# Altium PCB ENOCHv1.0.PcbDoc
Units mil, origin at the board's own origin, x right, y up, seen from the top; angles counter-clockwise.
Board outline 472.44 x 503.94 mil, 2 copper layers (Top Layer, Bottom Layer); 22 components, 15 nets, 55 pads, 20 vias.
Unrouted connection lines stored in the file: 45.
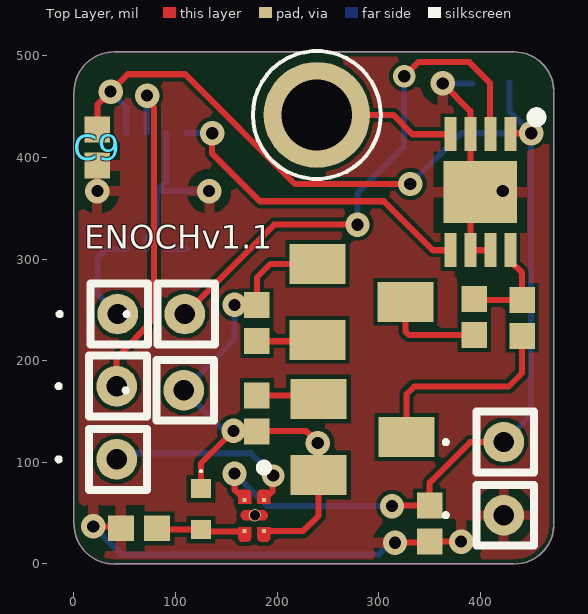
[diagram p0: Top Layer view]
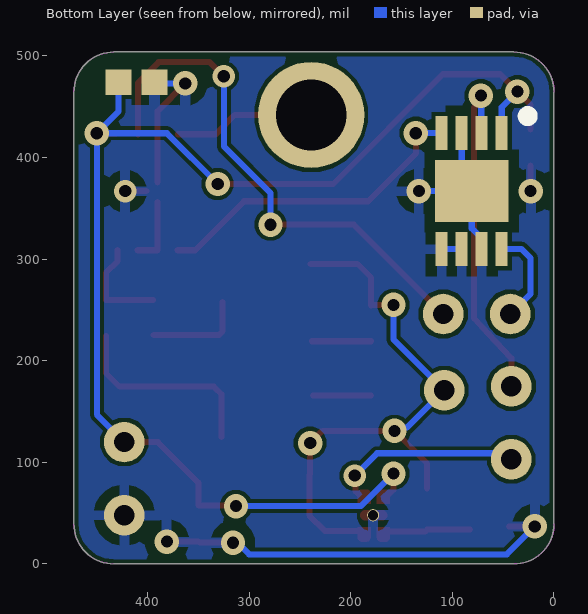
[diagram p1: Bottom Layer view, seen from below]
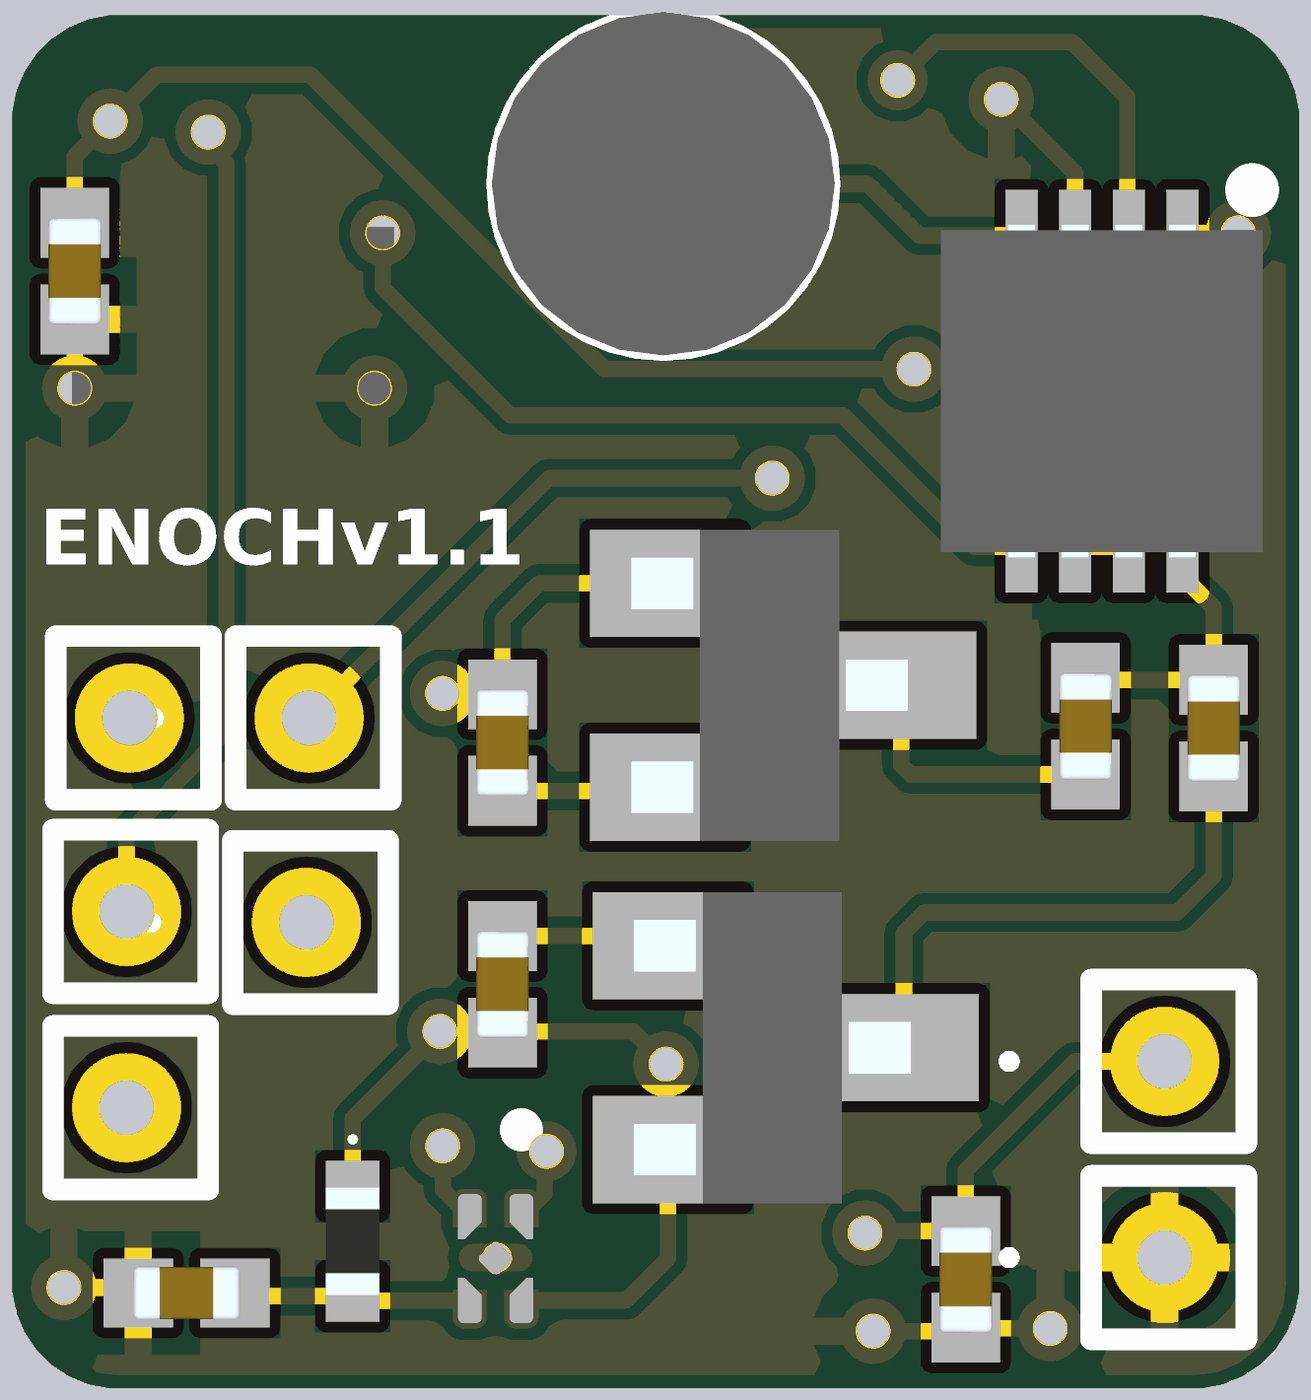
[diagram p2: 3D render of the assembled board from above, using the file's embedded part models]

## Layer stack, top to bottom
Top Solder: solder mask 0.4, Solder Resist, Dk 3.5
Top Layer: signal copper 1.4
Dielectric 1: dielectric 12.6, FR-4, Dk 4.8
Bottom Layer: signal copper 1.4
Bottom Solder: solder mask 0.4, Solder Resist, Dk 3.5

## Board outline
39.37,0 cw(c39.37,39.37) 0,39.37 0,464.57 cw(c39.37,464.57) 39.37,503.94 433.07,503.94 cw(c433.07,464.57) 472.44,464.57 472.44,39.37 cw(c433.07,39.37) 433.07,0

## Design rules (kind name [scope] priority, off if disabled: settings)
Clearance [All] p1: gap=4 ignorepadtopadclearanceinfootprint=FALSE
HoleToHoleClearance [All] p1: gap=4 allowstackedmicrovias=TRUE
PolygonConnect [All] p1: connectstyle=Relief reliefconductorwidth=10 reliefentries=4 polygonreliefangle="90 Angle" airgapwidth=10
RoutingVias [All] p1: holewidth=12 width=24 viastyle="Through Hole" minholewidth=12 minwidth=24 maxholewidth=12 maxwidth=24
SilkToSolderMaskClearance [IsPad] p1: minsilkscreentomaskgap=2 clearancetoexposedcopper=TRUE
SolderMaskExpansion [All] p1: expansion=4 istentingtop=FALSE
SupplyNets "Schematic Supply Nets" [InNet('GND')] p1: voltage=0.000
Width [All] p1: maxlimit=10 minlimit=6 preferedwidth=6
28 further rules are at their usual default settings.

## Components (designator, comment, footprint, x,y, rotation, side; value= is the part's Value field where it differs from the comment)
C1 "4.7pF" CAPC1005X56N 394,243 r270 top
C2 "4.7pF" CAPC1005X56N 180,237 r90 top
C3 "100nF" CAPC1005X56N 64,35 r0 top
C4 "4.7pF" CAPC1005X56N 441,242.28 r270 top
C5 "4.7pF" CAPC1005X56N 180,148.28 r270 top
C6 "100pf" CAPC1005X56N 411,474 r0 bottom
C7 "0.1uf" CAPC1005X56N 350,40 r90 top
C9 "100pf" CAPC1005X56N 23,410 r90 top
CR1 "SMS7621-005LF" SOT23 283,258 r270 top
CR2 "SMS7621-005LF" SOT23 284,125 r270 top
IC1 "ADG918BCPZ-REEL7" SON50P300X300X85-9N-D 400,365.91 r270 top
IC2 "ADG901SCPZ-EP-RL7" SON50P300X300X85-9N-D 81,367 r270 bottom
J1 "1508-2" 15082 239,442 r0 top
J2 "850-10-001-10-001000" 8501000110001000 423,120 r0 top
J3 "850-10-001-10-001000" 8501000110001000 423,48 r0 top
J4 "850-10-001-10-001000" 8501000110001000 108,171 r0 top
J5 "850-10-001-10-001000" 8501000110001000 42,103 r0 top
J6 "850-10-001-10-001000" 8501000110001000 42,175 r0 top
J7 "850-10-001-10-001000" 8501000110001000 109,246 r0 top
J9 "850-10-001-10-001000" 8501000110001000 43,246 r0 top
R1 "100K" ERJ2RKD1004X 125,54 r270 top
U1 "TLV7031DPWR" IC_TLV7031DPWR 177.45,47.65 r270 top

## Footprints (in the part's own frame and the unit in brackets; to place one, negate y for a bottom-side part, rotate by r counter-clockwise, add the part's x,y. Pads: shape width x height; smd on the part's side, far side on the other; paste and mask are expansions set on the pad)
15082 [mm]
  round 2.655 hole 1.77: 1(0,0)
  silkscreen extent -1.6,-1.6 1.6,1.6, body extent -1.6,-1.59 1.6,1.59, height 2.46
8501000110001000 [mil]
  round 40 hole 20: 1(0,0)
  silkscreen extent -59,-30 30,30
CAPC1005X56N [mm]
  rect 0.65x0.64 smd: 1(-0.45,0) 2(0.45,0)
  body extent -0.5,-0.25 0.5,0.25, height 0.56
ERJ2RKD1004X [mm]
  rect 0.475x0.5 smd: 1(-0.512,0) 2(0.512,0)
  silkscreen extent -0.97,-0.03 -0.93,0.03, body extent -0.5,-0.25 0.5,0.25, height 0.35
IC_TLV7031DPWR [mm]
  rect 0.1x0.1 smd paste-1 mask+0: 1(-0.39,0.24) 2(-0.39,-0.24) 4(0.39,-0.24) 5(0.39,0.24)
  round 0.305 hole 0.254 mask+0: 3(-0.009,0.014)
  Top Layer region: 0.56,0.399 0.566,0.399 0.571,0.398 0.576,0.397 0.581,0.395 0.586,0.393 0.591,0.391 0.595,0.389 0.6,0.387 0.604,0.384 0.609,0.381 0.613,0.378 0.617,0.374 0.621,0.371 0.624,0.367 0.628,0.363 0.631,0.359 0.634,0.354 0.637,0.35 0.639,0.345 0.641,0.341 0.643,0.336 0.645,0.331 0.647,0.326 0.648,0.321 0.649,0.316 0.649,0.31 0.65,0.305 0.65,0.3 0.65,0.18 0.65,0.175 0.649,0.17 0.649,0.164 0.648,0.159 0.647,0.154 0.645,0.149 0.643,0.144 0.641,0.139 0.639,0.135 0.637,0.13 0.634,0.126 0.631,0.121 0.628,0.117 0.624,0.113 0.621,0.109 0.617,0.106 0.613,0.102 0.609,0.099 0.604,0.096 0.6,0.093 0.595,0.091 0.591,0.089 0.586,0.087 0.581,0.085 0.576,0.083 0.571,0.082 0.566,0.081 0.56,0.081 0.555,0.08 0.29,0.08 0.29,0.4 0.555,0.4
  Top Layer region: -0.29,-0.08 -0.29,-0.4 -0.555,-0.4 -0.56,-0.399 -0.566,-0.399 -0.571,-0.398 -0.576,-0.397 -0.581,-0.395 -0.586,-0.393 -0.591,-0.391 -0.595,-0.389 -0.6,-0.387 -0.604,-0.384 -0.609,-0.381 -0.613,-0.378 -0.617,-0.374 -0.621,-0.371 -0.624,-0.367 -0.628,-0.363 -0.631,-0.359 -0.634,-0.354 -0.637,-0.35 -0.639,-0.345 -0.641,-0.341 -0.643,-0.336 -0.645,-0.331 -0.647,-0.326 -0.648,-0.321 -0.649,-0.316 -0.649,-0.31 -0.65,-0.305 -0.65,-0.3 -0.65,-0.18 -0.65,-0.175 -0.649,-0.17 -0.649,-0.164 -0.648,-0.159 -0.647,-0.154 -0.645,-0.149 -0.643,-0.144 -0.641,-0.139 -0.639,-0.135 -0.637,-0.13 -0.634,-0.126 -0.631,-0.121 -0.628,-0.117 -0.624,-0.113 -0.621,-0.109 -0.617,-0.106 -0.613,-0.102 -0.609,-0.099 -0.604,-0.096 -0.6,-0.093 -0.595,-0.091 -0.591,-0.089 -0.586,-0.087 -0.581,-0.085 -0.576,-0.083 -0.571,-0.082 -0.566,-0.081 -0.56,-0.081 -0.555,-0.08
  Top Layer region: -0.29,0.08 -0.555,0.08 -0.56,0.081 -0.566,0.081 -0.571,0.082 -0.576,0.083 -0.581,0.085 -0.586,0.087 -0.591,0.089 -0.595,0.091 -0.6,0.093 -0.604,0.096 -0.609,0.099 -0.613,0.102 -0.617,0.106 -0.621,0.109 -0.624,0.113 -0.628,0.117 -0.631,0.121 -0.634,0.126 -0.637,0.13 -0.639,0.135 -0.641,0.139 -0.643,0.144 -0.645,0.149 -0.647,0.154 -0.648,0.159 -0.649,0.164 -0.649,0.17 -0.65,0.175 -0.65,0.18 -0.65,0.3 -0.65,0.305 -0.649,0.31 -0.649,0.316 -0.648,0.321 -0.647,0.326 -0.645,0.331 -0.643,0.336 -0.641,0.341 -0.639,0.345 -0.637,0.35 -0.634,0.354 -0.631,0.359 -0.628,0.363 -0.624,0.367 -0.621,0.371 -0.617,0.374 -0.613,0.378 -0.609,0.381 -0.604,0.384 -0.6,0.387 -0.595,0.389 -0.591,0.391 -0.586,0.393 -0.581,0.395 -0.576,0.397 -0.571,0.398 -0.566,0.399 -0.56,0.399 -0.555,0.4 -0.29,0.4
  Top Layer region: 0.56,-0.081 0.566,-0.081 0.571,-0.082 0.576,-0.083 0.581,-0.085 0.586,-0.087 0.591,-0.089 0.595,-0.091 0.6,-0.093 0.604,-0.096 0.609,-0.099 0.613,-0.102 0.617,-0.106 0.621,-0.109 0.624,-0.113 0.628,-0.117 0.631,-0.121 0.634,-0.126 0.637,-0.13 0.639,-0.135 0.641,-0.139 0.643,-0.144 0.645,-0.149 0.647,-0.154 0.648,-0.159 0.649,-0.164 0.649,-0.17 0.65,-0.175 0.65,-0.18 0.65,-0.3 0.65,-0.305 0.649,-0.31 0.649,-0.316 0.648,-0.321 0.647,-0.326 0.645,-0.331 0.643,-0.336 0.641,-0.341 0.639,-0.345 0.637,-0.35 0.634,-0.354 0.631,-0.359 0.628,-0.363 0.624,-0.367 0.621,-0.371 0.617,-0.374 0.613,-0.378 0.609,-0.381 0.604,-0.384 0.6,-0.387 0.595,-0.389 0.591,-0.391 0.586,-0.393 0.581,-0.395 0.576,-0.397 0.571,-0.398 0.566,-0.399 0.56,-0.399 0.555,-0.4 0.29,-0.4 0.29,-0.08 0.555,-0.08
  silkscreen extent -1.3,0.14 -1.1,0.34, body extent -0.65,-0.4 0.65,0.4, height 0.4
SON50P300X300X85-9N-D [mm]
  rect 0.85x0.3 smd: 1(-1.45,0.75) 2(-1.45,0.25) 3(-1.45,-0.25) 4(-1.45,-0.75) 5(1.45,-0.75) 6(1.45,-0.25) 7(1.45,0.25) 8(1.45,0.75)
  rect 1.55x1.84 smd: 9(0,0)
  silkscreen extent -2,1.28 -1.75,1.53, body extent -1.55,-1.5 1.55,1.5, height 0.85
SOT23 [mm]
  rect 1x1.4 smd: 1(-0.95,-1.1) 2(0.95,-1.1) 3(0,1.1)
  body extent -1.45,-1.42 1.45,1.16, height 1.2

## Part data
C1 C2 C4 C5 C6 C7 C9: library part 0402ZA4R7CAT2A, "Capacitor", Manufacturer_Name="Kyocera AVX", Mouser Part Number=581-0402ZA4R7CAT2A, Datasheet Link=http://www.mouser.com/catalog/supplier/library/pdf/AVXSurfaceMountCeramic.pdf, Height=0.56mm, Manufacturer_Part_Number=0402ZA4R7CAT2A, Mouser Price/Stock=https://www.mouser.co.uk/ProductDetail/Kyocera-AVX/0402ZA4R7CAT2A?qs=ZwvTZoB9SO9MyqBkNMOKqQ%3D%3D
C3: library part 04025A101KAT2A, "Capacitor", Manufacturer_Name="Kyocera AVX", Mouser Part Number=581-04025A101KAT2A, Datasheet Link=http://www.mouser.com/catalog/supplier/library/pdf/AVXSurfaceMountCeramic.pdf, Height=0.56mm, Manufacturer_Part_Number=04025A101KAT2A, Mouser Price/Stock=https://www.mouser.co.uk/ProductDetail/AVX/04025A101KAT2A?qs=hnOPNQ0PpSHZ7VloB%252BWZkw%3D%3D
CR1 CR2: "No Description Available", Mfr_Name=Skyworks, RefDes=RefDes, Type=Type
IC1: "Integrated Circuit", Manufacturer_Name="Analog Devices", Mouser Part Number=584-ADG918BCPZ-R7, Arrow Part Number=ADG918BCPZ-REEL7, Arrow Price/Stock=https://www.arrow.com/en/products/adg918bcpz-reel7/analog-devices?region=nac, Datasheet Link=http://www.analog.com/media/en/technical-documentation/data-sheets/ADG918_919.pdf, Height=0.85mm, Manufacturer_Part_Number=ADG918BCPZ-REEL7, Mouser Price/Stock=https://www.mouser.co.uk/ProductDetail/Analog-Devices/ADG918BCPZ-REEL7?qs=BpaRKvA4VqEK8oT2sWj1IQ%3D%3D
IC2: "Integrated Circuit", Manufacturer_Name="Analog Devices", Mouser Part Number=584-ADG901SCPZEPRL7, Arrow Part Number=ADG901SCPZ-EP-RL7, Arrow Price/Stock=https://www.arrow.com/en/products/adg901scpz-ep-rl7/analog-devices?region=nac, Datasheet Link=https://www.analog.com/media/en/technical-documentation/data-sheets/ADG901-EP.pdf, Height=0.85mm, Manufacturer_Part_Number=ADG901SCPZ-EP-RL7, Mouser Price/Stock=https://www.mouser.co.uk/ProductDetail/Analog-Devices/ADG901SCPZ-EP-RL7?qs=S8zVn2bBIh8DlciUwzRt2A%3D%3D
J1: "Connector", Manufacturer_Name="Keystone Electronics", Mouser Part Number=534-1508-2, Datasheet Link=http://keyelco.com/userAssets/file/M65p142.pdf, Height=2.36mm, Manufacturer_Part_Number=1508-2, Mouser Price/Stock=https://www.mouser.com/Search/Refine.aspx?Keyword=534-1508-2
J2 J3 J4 J5 J6 J7 J9: "Connector", Manufacturer_Name=Mill-Max, Datasheet Link=https://www.mill-max.com/products/datasheet/sockets/850-10-001-10-001000, Height=5.207mm, Manufacturer_Part_Number=850-10-001-10-001000
R1: library part ERJ-2RKF1003X, "Resistor", Manufacturer_Name=Panasonic, Mouser Part Number=667-ERJ-2RKF1003X, Arrow Part Number=ERJ-2RKF1003X, Arrow Price/Stock=https://www.arrow.com/en/products/erj-2rkf1003x/panasonic?region=europe, Datasheet Link=https://industrial.panasonic.com/cdbs/www-data/pdf/RDA0000/AOA0000C86.pdf, Height=0.4mm, Manufacturer_Part_Number=ERJ-2RKF1003X, Mouser Price/Stock=https://www.mouser.co.uk/ProductDetail/Panasonic/ERJ-2RKF1003X?qs=H7k1u0Mp9JQnXoBKdf15Qg%3D%3D
U1: Package=None, Availability=Unavailable, MF="{'manufacturer': u'Texas Instruments'}", MP=TLV7031DPWR, Price=None

## Via types
v1: diameter 24, hole 12, Top Layer to Bottom Layer, tented both sides, 17 vias
v2: diameter 22, hole 12, Top Layer to Bottom Layer, tented both sides, 3 vias

## Nets (pads, with @x,y where several pads share a name; then routed paths per layer and width w, separated by ;. In a path a pad name is that pad's centre, name@x,y a point inside that pad or via, vN(x,y) a via of type N, cw(c..) or ccw(c..) an arc to the next point about the centre after c; other vN are vias at no path point)
3V3: C6.2 C7.2 C9.2 IC1.1 IC2.1 J2.1 U1.2 | length 1316.5
  Top Layer w6: C9.2 23,452 53,482 109.44,482 217.44,374 v1(331,374) ; v1(158,89) 158.01,72.99 U1.2 ; v1@313.72,57.72 C7.2 ; C7.2 349.97,79.97 390,120 J2.1 ; IC1.1@430.53,424 v1(450,424)
  Bottom Layer w6: v1(36,465) 51.47,449.53 IC2.1 ; v1(158,89) 190,57 v1(313,57) ; v1(331,374) 381,424 v1(450,424) ; J2.1 450,147 v1(450,424) ; C6.2 428.72,445.28 v1(450,424)
Antenna: IC1.4 J1.1 | length 138.9
  Top Layer w6: J1.1 314,442 333,423 IC1.4@370.03,423
GND: C3.1 C6.1 C7.1 C9.1 IC1.3 IC1.6 IC1.7 IC1.9 IC2.3 IC2.5 IC2.6 IC2.7 IC2.9 J3.1 U1.3 | length 866.3
  Top Layer w6: v1(19,37) C3.1@44.28,37 ; v1(23,367) C9.1 ; v1(316,21) 348.72,21 C7.1 350.28,22 v1(381,22) ; v1(363,473) 390.16,445.84 IC1.3 IC1.9@390.16,375.76 ; IC1.9@390.16,356.07 IC1.6 IC1.7 ; IC1.9@401.09,367 v2(422,367)
  Top Layer w10: 169,48 186,48
  Bottom Layer w6: v1(19,37) 46.5,9.5 299.99,9.5 311.49,21 v1(316,21) ; IC2.7 71.16,320.74 80.44,330.02 81,330.02 IC2.9 ; IC2.6 IC2.5 ; IC2.3 90.84,376.84 IC2.9 ; v1(133,367) IC2.9 ; v1(363,473) C6.1@392.28,473
NetC1_2: C1.2 CR1.3 | length 98.3
  Top Layer w6: CR1.3 326.31,228.8 329.82,225.28 C1.2
NetC2_1: C2.1 CR1.2 | length 58.4
  Top Layer w6: C2.1 CR1.2@238.37,219.28
NetC3_2: C3.2 R1.2 U1.4 | length 88
  Top Layer w6: C3.2@82.87,33.84 R1.2 126.67,32.17 162.83,32.17 168,27
NetC4_2: C4.2 CR2.3 | length 201.1
  Top Layer w6: CR2.3 327.28,167.21 334.71,174.64 427.64,174.64 441,188 C4.2
NetC5_1: C5.1 CR2.1 | length 57.1
  Top Layer w6: C5.1 CR2.1@237.09,166
PWM: IC2.8 J9.1 | length 95.4
  Bottom Layer w6: J9.1 23.04,265.96 23.04,301.04 31.91,309.91 IC2.8
PWMOut: IC1.5 IC2.4 | length 319.3
  Top Layer w6: v1(136,424) 136,404 183,357 305,357 353.17,308.83 IC1.5
  Bottom Layer w6: IC2.4 v1@135.91,424.09
PWMSW: IC2.2 J6.1 | length 339.4
  Top Layer w6: J6.1 42,202.61 64.12,226.13 ccw(c43,246) 64.19,226.2 78.68,241.68 78.69,449.43 72,456.13 v1(72,461)
  Bottom Layer w6: IC2.2@71.58,424.51 v1@71.58,460.58
SingalA: C2.2 C5.2 CR1.1 CR2.2 J4.1 R1.1 U1.5 | length 573.2
  Top Layer w6: R1.1 125,99 v1(157,131) 228,131 v1(240,119) ; v1@158.57,255 179.72,255 C2.2 180,282 193.4,295.4 CR1.1 ; U1.5 225.29,32.29 240.69,47.69 CR2.2 ; CR2.2@240,88.29 v1@240,118.95
  Bottom Layer w6: v1(157,131) 153.56,134.44 144.56,134.44 J4.1 158,221 v1(158,255)
SingalD: J5.1 U1.1 | length 193.6
  Top Layer w6: U1.1 195.37,71.47 195.37,86.24 v2(196.13,87)
  Bottom Layer w6: J5.1 48,109 174.13,109 v2(196.13,87)
SingalInput: C1.1 C4.1 IC1.8 | length 99.9
  Top Layer w6: C1.1@394.72,260 C4.1 441,286.53 429.53,298 IC1.8
TRsw: IC1.2 J7.1 | length 518.7
  Top Layer w6: J7.1 197,334 v1(279,334) ; v2(325,480) 339,494 389,494 409.4,473.6 IC1.2@409.4,422.56
  Bottom Layer w6: v1(279,334) 279,365 325,411 v2@325,477.49

## Polygon pours and split planes (outlines as drawn)
GND on Bottom Layer "NONET_L-01_P-001" (solid, remove dead copper, pour order 0): 451,513 488,476 488,-4 0,-4 -21.13,-4 -21.13,55.87 -21.13,506.58 -14.71,513
GND on Top Layer "NONET_L-01_P-001" (solid, remove dead copper, pour order 1): 459.13,508.78 496.13,471.78 496.13,-8.22 8.13,-8.22 -13,-8.22 -13,51.65 -13,502.35 -6.58,508.78

## Keep-outs
Keep-Out Layer:
  the board outline again, w1

## Silkscreen, mask and mechanical layers (free items; w line width, h text height)
Top Overlay:
  text "ENOCHv1.1" at 10,302.37 h40